# Altium PCB Safety.PcbDoc
Units mm, origin at the board's own origin, x right, y up, seen from the top; angles counter-clockwise.
Board outline 63.5 x 63.5 mm, 2 copper layers (Top Layer, Bottom Layer), stack 1.443 mm thick; 54 components, 58 nets, 210 pads, 36 vias.
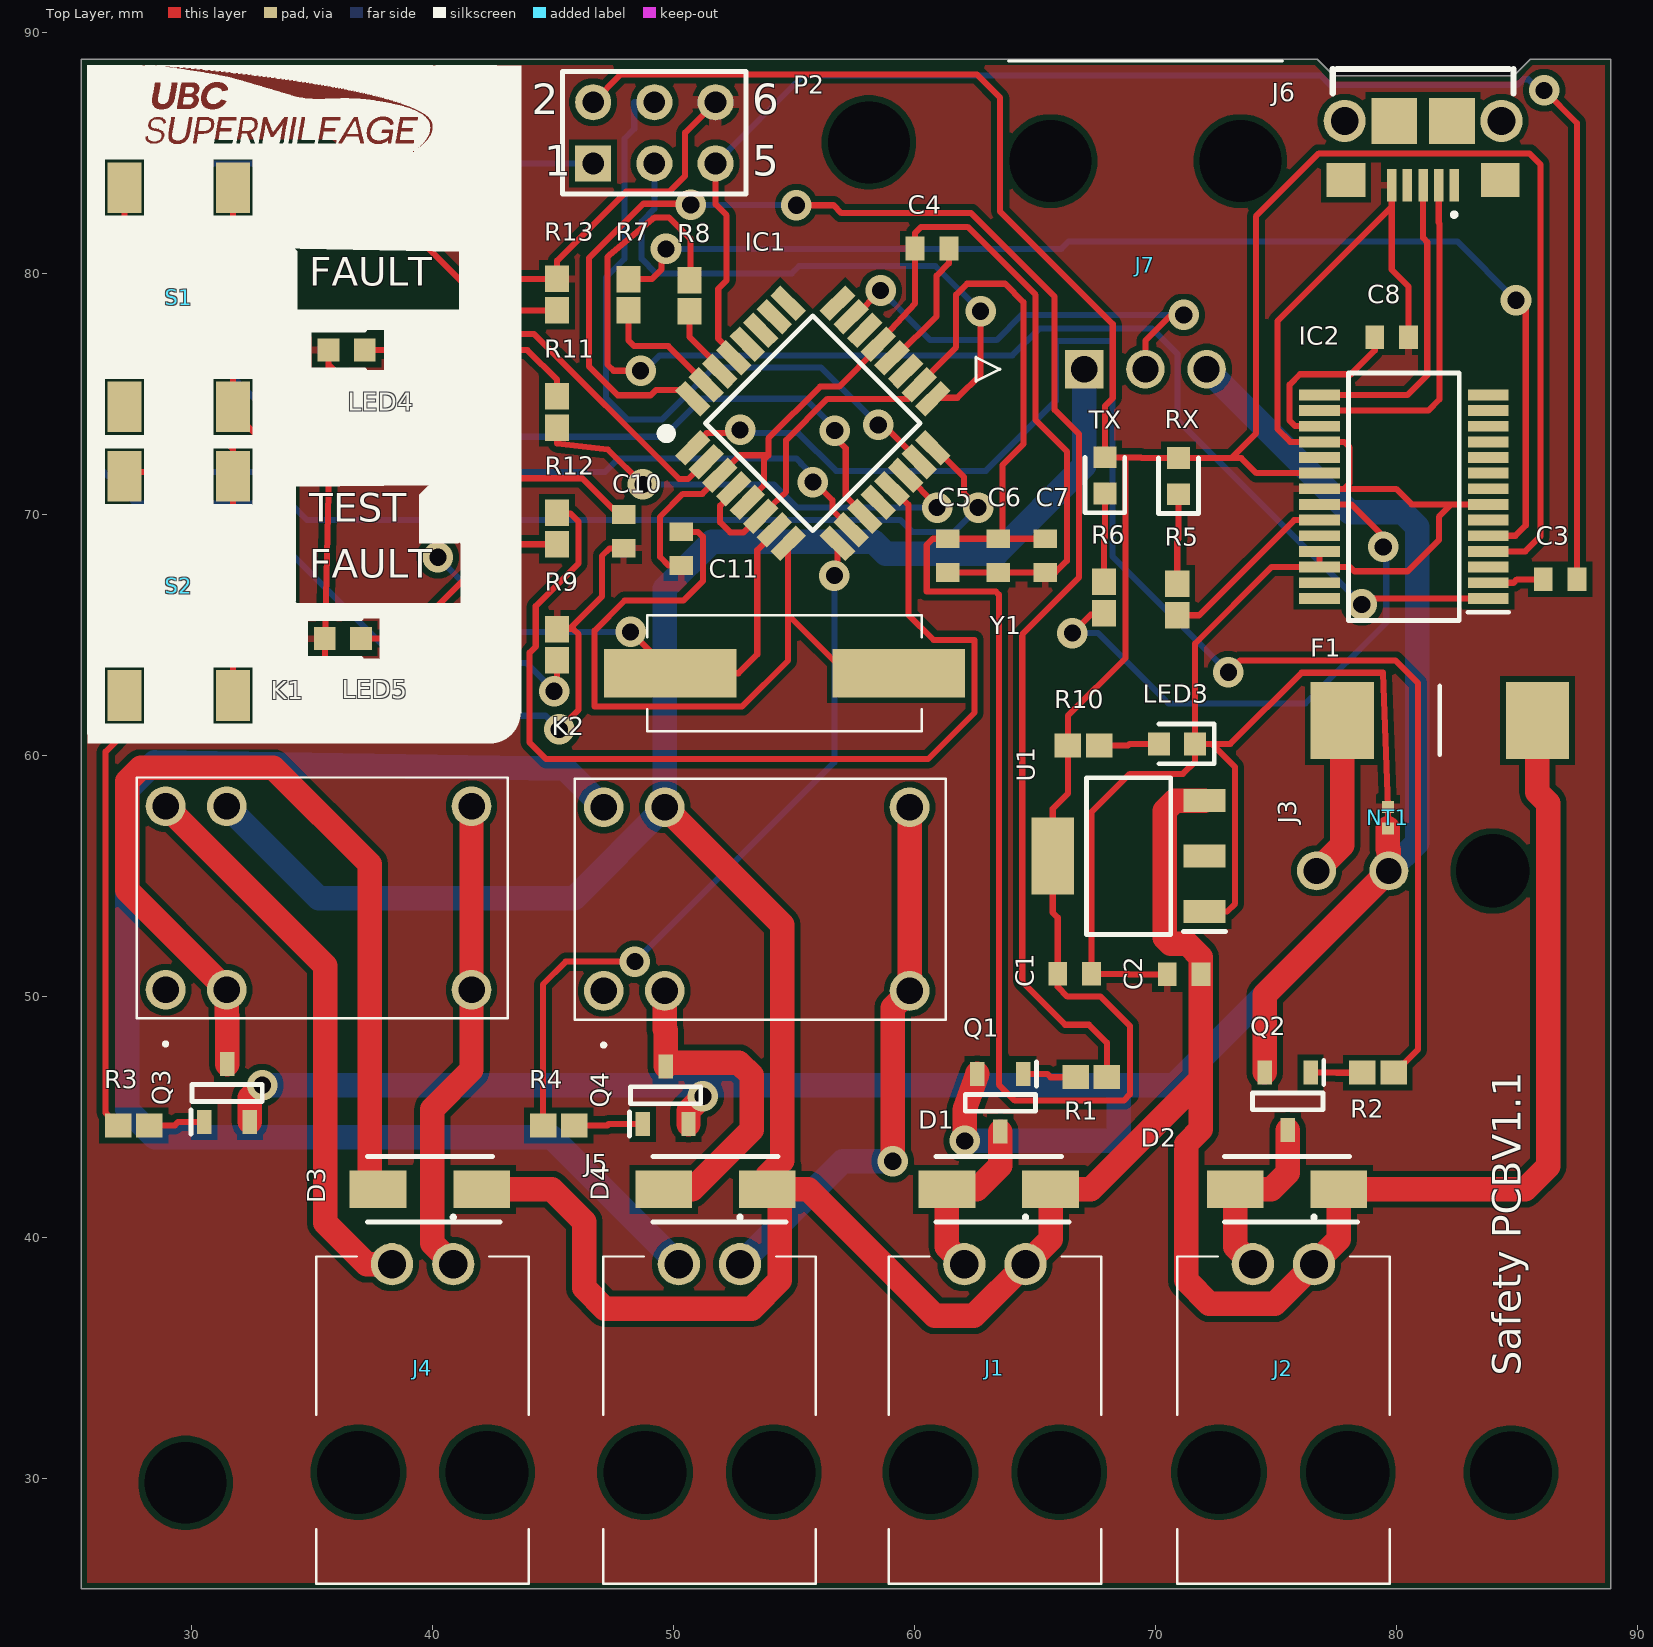
[diagram p0: Top Layer view]
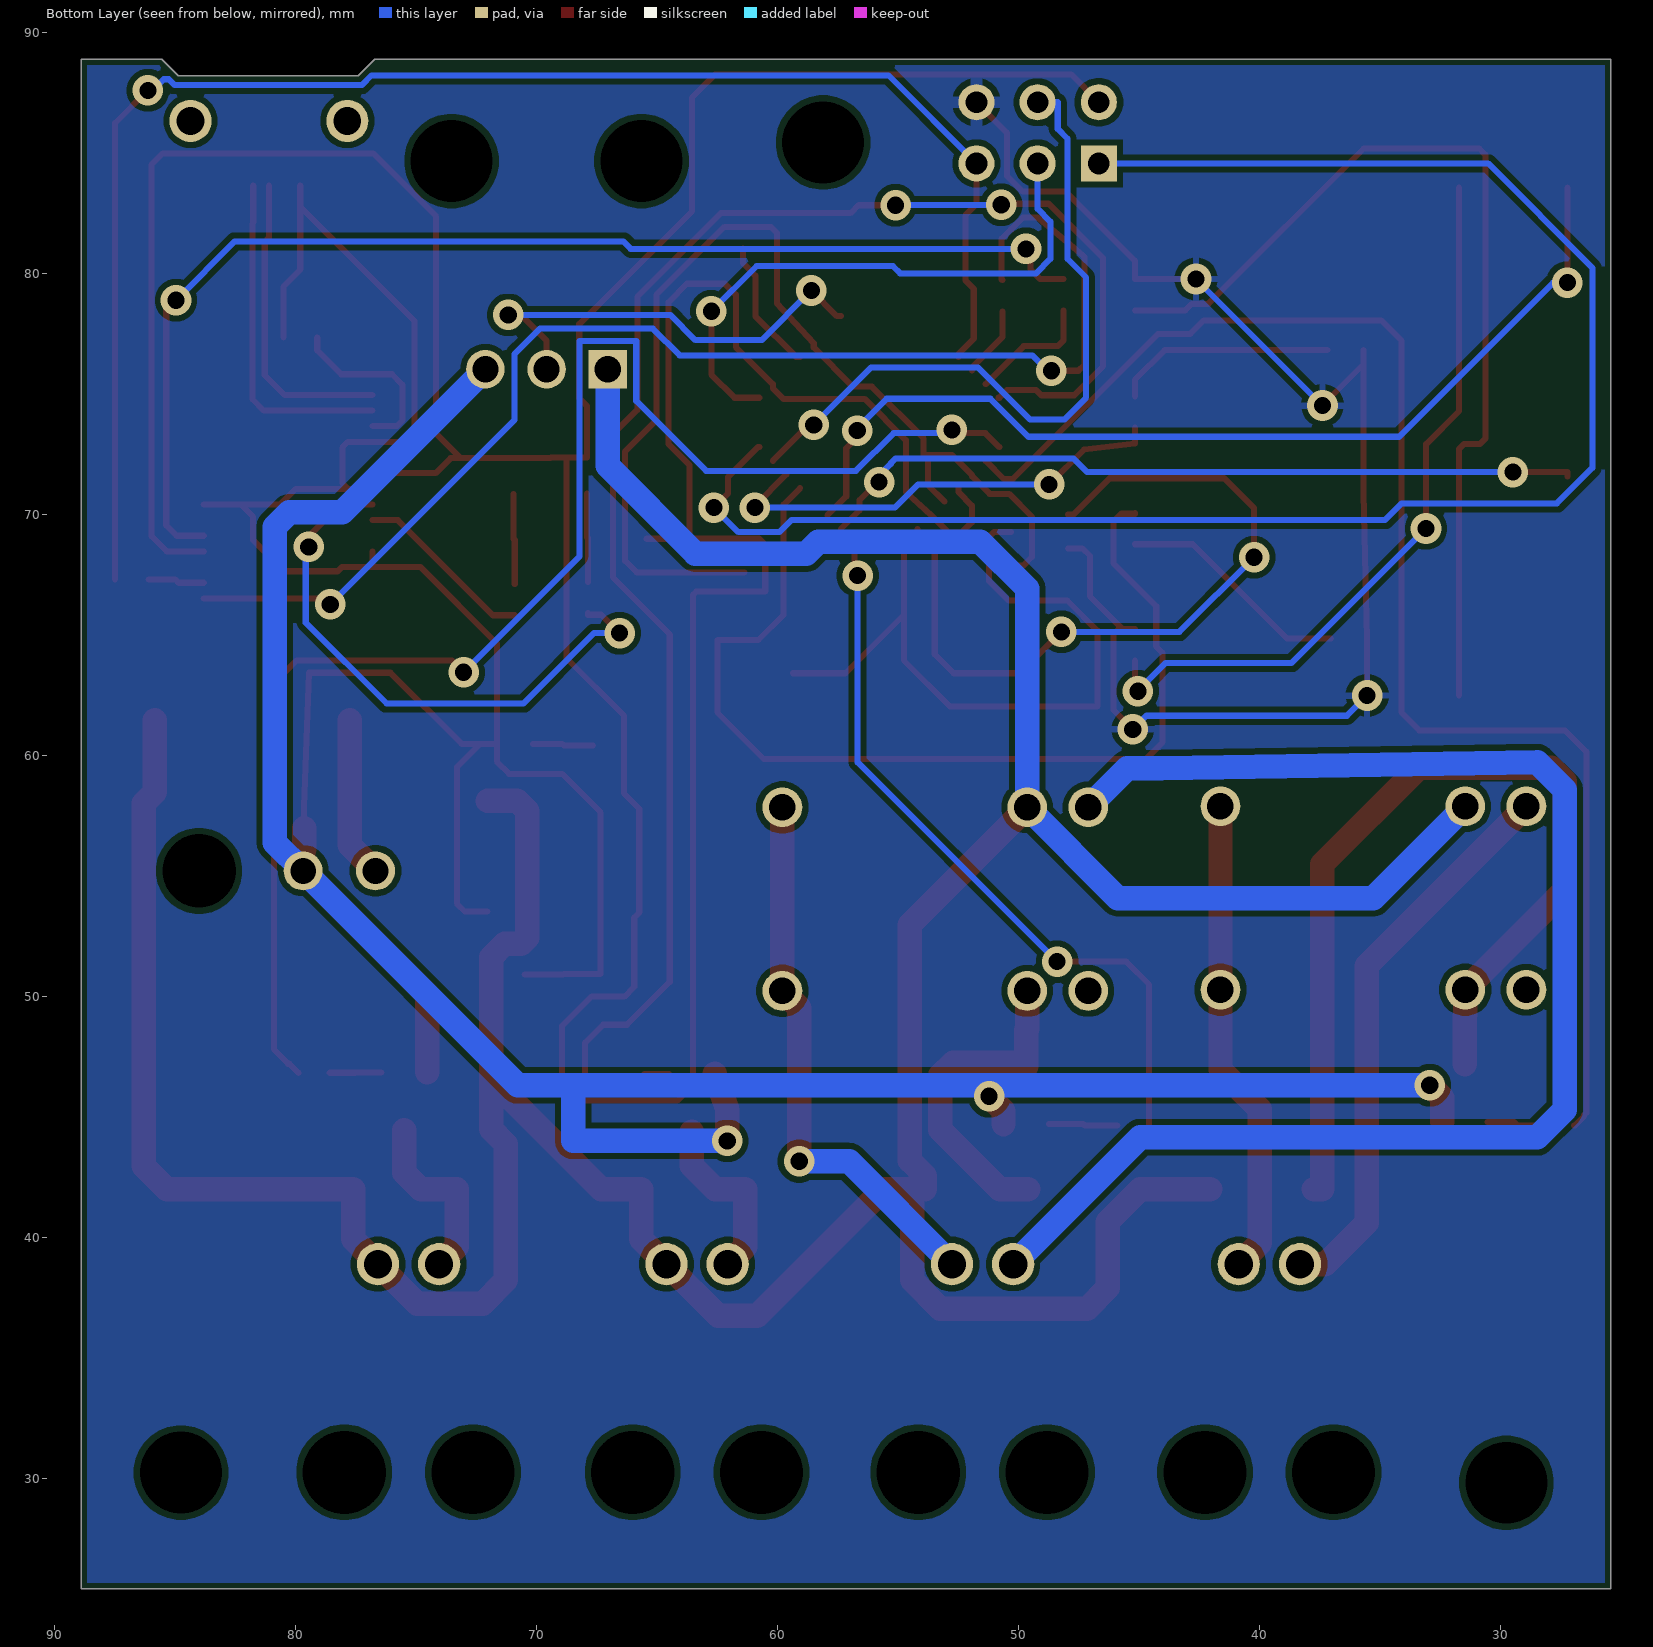
[diagram p1: Bottom Layer view, seen from below]
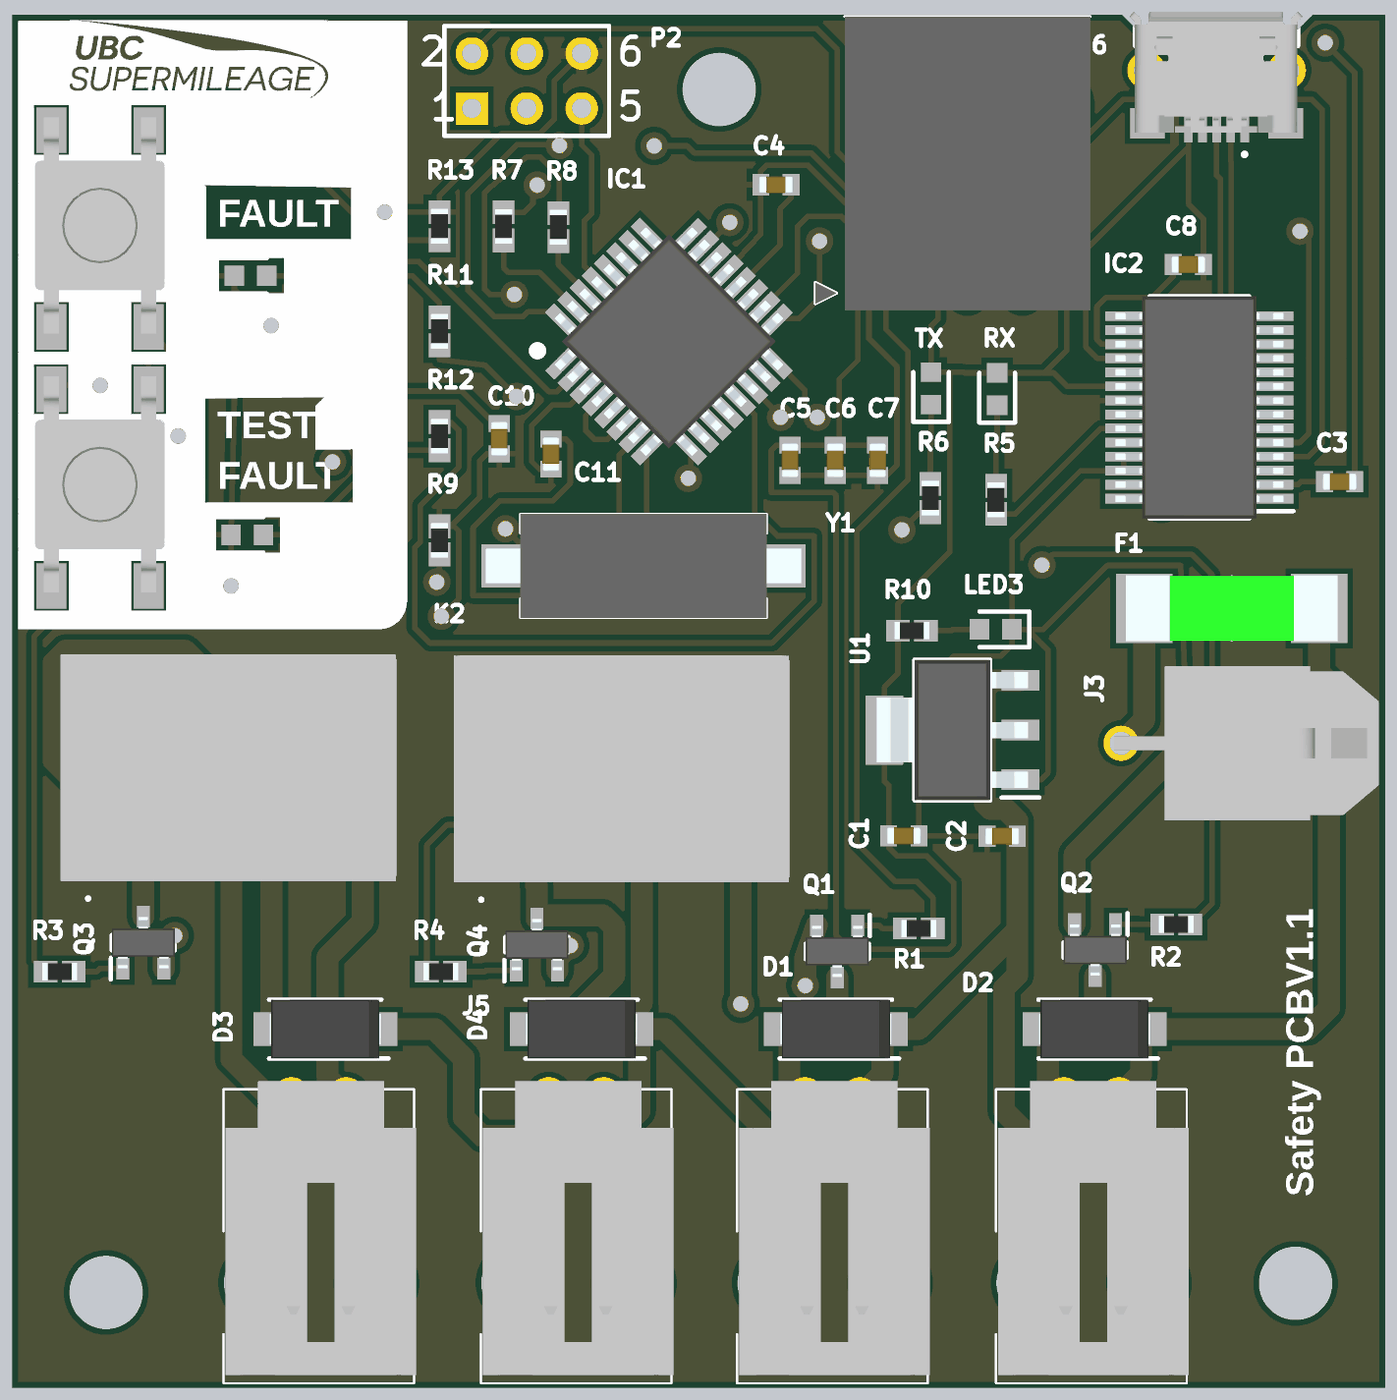
[diagram p2: 3D render of the assembled board from above, using the file's embedded part models]

## Layer stack, top to bottom
Top Solder: solder mask 0.0102, Solder Resist, Dk 3.5
Top Layer: signal copper 0.0356
Dielectric 1: dielectric 1.3716, FR-4, Dk 4.8
Bottom Layer: signal copper 0.0356
Bottom Solder: solder mask 0.0102, Solder Resist, Dk 3.5

## Board outline
25.4,25.4 25.4,88.9 76.71,88.9 77.396,88.214 84.872,88.214 85.558,88.9 88.9,88.9 88.9,25.4

## Design rules (kind name [scope] priority, off if disabled: settings)
BoardOutlineClearance [All] p1: gap=0.254 ignorepadtopadclearanceinfootprint=FALSE except(0: Arc-SplitContinuation Track-SplitContinuation SMDPad-SplitContinuation THPad-SplitContinuation Via-SplitContinuation Fill-SplitContinuation Poly-SplitContinuation Region-SplitContinuation Text-SplitContinuation)
Clearance [All] p1: gap=0.254 ignorepadtopadclearanceinfootprint=TRUE
PolygonConnect [All] p1: thpad.connectstyle=Relief thpad.reliefconductorwidth=0.508 thpad.reliefentries=4 thpad.polygonreliefangle="90 Angle" thpad.airgapwidth=0.254 smdpad.connectstyle=Relief smdpad.reliefconductorwidth=0.254 smdpad.reliefentries=4 smdpad.polygonreliefangle="90 Angle" smdpad.airgapwidth=0.254 via.connectstyle=Relief via.reliefconductorwidth=0.254 via.reliefentries=4 via.polygonreliefangle="90 Angle" via.airgapwidth=0.254
RoutingVias [All] p1: holewidth=0.711 width=1.27 viastyle="Through Hole" minholewidth=0.711 minwidth=1.27 maxholewidth=0.711 maxwidth=1.27
SolderMaskExpansion [IsVia] p1: expansion=0.102 istentingtop=TRUE
Width "Width_HIGH CURRENT" [InNetClass('PWR')] p1: maxlimit=2.54 minlimit=0.762 preferedwidth=1.016 minimp=50.000000 maximp=50.000000 favimp=50.000000
Width Width_1 [All] p2: maxlimit=0.254 minlimit=0.152 preferedwidth=0.254 bottomlayer_minwidth=0.254 minimp=50.000000 maximp=50.000000 favimp=50.000000
30 further rules are at their usual default settings.

## Classes and differential pairs
net class PWR: +12 NetD1_2 NetD2_2 NetD3_2 NetD4_2 NetF1_2 NetJ4_1 NetJ4_2 NetJ5_1 NetJ5_2 PWR_GND
component class Sheet2: C3 C4 C5 C6 C7 C8 C10 C11 IC1 IC2 J6 J7 LED3 LED4 LED5 P2 R5 R6 R7 R8 R9 R10 R11 R12 R13 RX S1 S2 TX Y1
component class Sheet1: C1 C2 D1 D2 D3 D4 F1 J1 J2 J3 J4 J5 K1 K2 NT1 Q1 Q2 Q3 Q4 R1 R2 R3 R4 U1

## Components (designator, comment, footprint, x,y, rotation, side; value= is the part's Value field where it differs from the comment)
C1 "C0603C104K3RACTU" CAPC1608X95N 66.638,50.926 r180 top
C2 "C0603C104K3RACTU" CAPC1608X95N 71.185,50.907 r0 top
C3 "C0603C104K3RACTU" CAPC1608X95N 86.796,67.304 r0 top
C4 "C0603C104K3RACTU" CAPC1608X95N 60.72,81.043 r0 top
C5 "C0603C104K3RACTU" CAPC1608X95N 61.376,68.294 r90 top
C6 "C0603C104K3RACTU" CAPC1608X95N 63.463,68.294 r90 top
C7 "C0603C104K3RACTU" CAPC1608X95N 65.427,68.294 r90 top
C8 "C0603C104K3RACTU" CAPC1608X95N 79.799,77.349 r180 top
C10 "C0603C104K3RACTU" CAPC1608X95N 47.925,69.294 r90 top
C11 "C0603C104K3RACTU" CAPC1608X95N 50.313,68.58 r270 top
D1 "S1A" DIOM5227X270N 63.492,41.985 r180 top
D2 "S1A" DIOM5227X270N 75.462,41.985 r180 top
D3 "S1A" DIOM5227X270N 39.874,41.985 r180 top
D4 "S1A" DIOM5227X270N 51.73,41.985 r180 top
F1 "0678H9100-02" FUSC9830X318N 81.802,61.45 r180 top
IC1 "ATMEGA328P-AU" QFP80P900X900X120-32N 55.771,73.786 r45 top
IC2 "FT232RL" SOP65P778X200-28N 80.311,70.739 r180 top
J1 "171975-0002" 1719750002 63.333,38.877 r0 top
J2 "171975-0002" 1719750002 75.31,38.877 r0 top
J3 "0430450200" 43045-0200 84.006,55.204 r90 top
J4 "171975-0002" 1719750002 39.576,38.877 r0 top
J5 "171975-0002" 1719750002 51.48,38.877 r0 top
J6 "2013499-1" 2013499-1 81.106,88.486 r180 top
J7 "1719750003" 171975YY03 67.04,76.028 r180 top
K1 "1422037-2" 14220372 28.904,50.27 r0 top
K2 "1422037-2" 14220372 47.089,50.22 r0 top
LED3 "LTST-C191TBKT-5A" LEDC1608X65N 70.891,60.474 r180 top
LED4 "LTST-C191TBKT-5A" LEDC1608X65N 36.417,76.826 r0 top
LED5 "LTST-C191TBKT-5A" LEDC1608X65N 36.265,64.847 r0 top
NT1 "NetTie10" NetTie 79.649,56.966 r90 top net-tie
P2 "Header 3X2" HDR2X3 46.654,84.572 r0 top
Q1 "BCW66GLT1G" SOT95P237X111-3N 63.557,45.577 r270 top
Q2 "BCW66GLT1G" SOT95P237X111-3N 75.485,45.639 r270 top
Q3 "BCW66GLT1G" SOT95P237X111-3N 31.457,45.983 r90 top
Q4 "BCW66GLT1G" SOT95P237X111-3N 49.662,45.889 r90 top
R1 "RC0603DR-07270KL" RESC1608X55N 67.33,46.639 r180 top
R2 "RC0603DR-07270KL" RESC1608X55N 79.232,46.826 r180 top
R3 "RC0603DR-07270KL" RESC1608X55N 27.585,44.64 r0 top
R4 "RC0603DR-07270KL" RESC1608X55N 45.222,44.64 r0 top
R5 "RC0603DR-07270KL" RESC1608X55N 70.9,66.466 r90 top
R6 "RC0603DR-07270KL" RESC1608X55N 67.862,66.55 r90 top
R7 "RC0603DR-07270KL" RESC1608X55N 48.123,79.117 r90 top
R8 "RC0603DR-07270KL" RESC1608X55N 50.656,79.077 r90 top
R9 "RC0603DR-07270KL" RESC1608X55N 45.158,64.591 r90 top
R10 "RC0603DR-07270KL" RESC1608X55N 67.012,60.414 r180 top
R11 "RC0603DR-07270KL" RESC1608X55N 45.158,74.26 r270 top
R12 "RC0603DR-07270KL" RESC1608X55N 45.158,69.415 r90 top
R13 "RC0603DR-07270KL" RESC1608X55N 45.158,79.125 r90 top
RX "LTST-C191TBKT-5A" LEDC1608X65N 70.954,71.591 r90 top (schematic designator LED1)
S1 "5-1437565-0" FSM6JSMATR 29.45,79.792 r0 top
S2 "5-1437565-0" FSM6JSMATR 29.45,67.808 r0 top
TX "LTST-C191TBKT-5A" LEDC1608X65N 67.897,71.622 r90 top (schematic designator LED2)
U1 "LM1117IMPX-5.0_NOPB" SOT230P700X180-4N 68.882,55.818 r180 top
Y1 "ECS-160-18-5PX-CKM-TR" ECS49205PXTR 54.595,63.408 r0 top

## Footprints (in the part's own frame and the unit in brackets; to place one, negate y for a bottom-side part, rotate by r counter-clockwise, add the part's x,y. Pads: shape width x height; smd on the part's side, far side on the other; paste and mask are expansions set on the pad)
43045-0200 [mm]
  round 1.62 hole 1.07: 1(0,4.32) 2(0,7.32)
  round 1.524 hole 3.05 unplated mask+0.102: 3(0,0)
  body extent -3.57,-4.6 3.58,7.64, height 8.25
171975YY03 [mm]
  rect 1.6x1.6 hole 1.09: 1(0,0)
  round 1.6 hole 1.09: 2(-2.54,0) 3(-5.08,0)
  round 1.524 hole 3.4 unplated mask+0.102: 4(1.4,-8.64) 5(-6.48,-8.64)
  silkscreen extent -8.22,-12.8 4.5,0.5, body extent -8.22,-12.8 4.5,0.79, height 7.1
2013499-1 [mm]
  rect 0.4x1.35 smd: 1(-1.3,4.825) 2(-0.65,4.825) 3(0,4.825) 4(0.65,4.825) 5(1.3,4.825)
  rect 1.6x1.4 smd: 6(-3.2,4.6) 7(3.2,4.6)
  rect 1.9x1.9 smd: 8(-1.2,2.15) 9(1.2,2.15)
  round 1.75 hole 1.15: 10(-3.255,2.15) 11(3.255,2.15)
  silkscreen extent -3.75,0 3.75,6.09, body extent -3.97,-0.56 4.03,5.04, height 2.68
14220372 [mm]
  round 1.65 hole 1.1: 1(0,0) 2(2.54,0) 6(12.7,0) 7(12.7,7.62) 11(2.54,7.62) 12(0,7.62)
  silkscreen extent -1.2,-2.3 14.2,8.81, body extent -1.27,-1.44 14.23,9.06, height 12.06
1719750002 [mm]
  round 1.755 hole 1.17: 1(1.27,0) 2(-1.27,0)
  round 1.725 hole 3.45 unplated mask+0.102: MH1(2.67,-8.64) MH2(-2.67,-8.64)
  silkscreen extent -4.41,-13.27 4.41,2, body extent -4.32,-12.89 4.5,0.7, height 7.63
CAPC1608X95N [mm]
  rect 0.78x0.98 smd: 1(-0.7,0) 2(0.7,0)
  body extent -0.8,-0.4 0.8,0.4, height 0.95
DIOM5227X270N [mm]
  rect 2.35x1.55 smd: 1(-2.15,0) 2(2.15,0)
  silkscreen extent -2.93,-1.36 2.6,1.36, body extent -2.6,-1.36 2.6,1.36, height 2.7
ECS49205PXTR [mm]
  rect 5.5x2 smd: 1(-4.75,0) 2(4.75,0)
  silkscreen extent -5.7,-2.4 5.7,2.4, body extent -7.3,-2.4 7.3,2.4, height 4.4
FSM6JSMATR [mm]
  rect 1.4x2.1 smd: 1(2.25,3.775) 2(2.25,-5.325) 3(-2.25,3.775) 4(-2.25,-5.325)
  silkscreen extent -3,-3.77 3,5.32, body extent -3,-5.63 3,4.37, height 7.21
FUSC9830X318N [mm]
  rect 2.62x3.2 smd: 1(-4.05,0) 2(4.05,0)
  silkscreen extent 0,-1.43 0,1.43, body extent -4.9,-1.53 4.9,1.53, height 3.18
HDR2X3 [mm] "Connector; Header; 3x2 Position"
  rect 1.5x1.5 hole 0.9: 1(0,0)
  round 1.5 hole 0.9: 2(0,2.54) 3(2.54,0) 4(2.54,2.54) 5(5.08,0) 6(5.08,2.54)
  silkscreen extent -1.27,-1.27 6.35,3.81
LEDC1608X65N [mm]
  rect 0.9x0.95 smd: 1(-0.75,0) 2(0.75,0)
  silkscreen extent -1.55,-0.82 0.75,0.82
NetTie [mil]
  rect 20x20 smd paste+0 mask+4: 1(35,0) 2(0,0)
  Top Layer lines w10: 0,0 35,0
QFP80P900X900X120-32N [mm]
  rect 1.5x0.6 smd: 1(-4.25,2.8) 2(-4.25,2) 3(-4.25,1.2) 4(-4.25,0.4) 5(-4.25,-0.4) 6(-4.25,-1.2) 7(-4.25,-2) 8(-4.25,-2.8) 17(4.25,-2.8) 18(4.25,-2) 19(4.25,-1.2) 20(4.25,-0.4) 21(4.25,0.4) 22(4.25,1.2) 23(4.25,2) 24(4.25,2.8)
  rect 0.6x1.5 smd: 9(-2.8,-4.25) 10(-2,-4.25) 11(-1.2,-4.25) 12(-0.4,-4.25) 13(0.4,-4.25) 14(1.2,-4.25) 15(2,-4.25) 16(2.8,-4.25) 25(2.8,4.25) 26(2,4.25) 27(1.2,4.25) 28(0.4,4.25) 29(-0.4,4.25) 30(-1.2,4.25) 31(-2,4.25) 32(-2.8,4.25)
  silkscreen extent -4.8,-3.15 3.15,4.2, body extent -4.5,-4.5 4.5,4.5, height 1.2
RESC1608X55N [mm]
  rect 1.1x1 smd: 1(-0.65,0) 2(0.65,0)
  body extent -0.8,-0.4 0.8,0.4, height 0.55
SOP65P778X200-28N [mm]
  rect 1.7x0.45 smd: 1(-3.5,4.225) 2(-3.5,3.575) 3(-3.5,2.925) 4(-3.5,2.275) 5(-3.5,1.625) 6(-3.5,0.975) 7(-3.5,0.325) 8(-3.5,-0.325) 9(-3.5,-0.975) 10(-3.5,-1.625) 11(-3.5,-2.275) 12(-3.5,-2.925) 13(-3.5,-3.575) 14(-3.5,-4.225) 15(3.5,-4.225) 16(3.5,-3.575) 17(3.5,-2.925) 18(3.5,-2.275) 19(3.5,-1.625) 20(3.5,-0.975) 21(3.5,-0.325) 22(3.5,0.325) 23(3.5,0.975) 24(3.5,1.625) 25(3.5,2.275) 26(3.5,2.925) 27(3.5,3.575) 28(3.5,4.225)
  silkscreen extent -4.35,-5.14 2.3,5.14, body extent -3.89,-5.14 3.89,5.14, height 2
SOT95P237X111-3N [mm]
  rect 1x0.6 smd: 1(-1.2,0.95) 2(-1.2,-0.95) 3(1.2,0)
  silkscreen extent -1.7,-1.46 0.35,1.5, body extent -1.18,-1.46 1.18,1.46, height 1.11
SOT230P700X180-4N [mm]
  rect 1.75x0.95 smd: 1(-3.15,2.3) 2(-3.15,0) 3(-3.15,-2.3)
  rect 1.75x3.2 smd: 4(3.15,0)
  silkscreen extent -4.02,-3.25 1.75,3.25, body extent -3.5,-3.25 3.5,3.25, height 1.8

## Part data
C1 C2 C3 C4 C5 C6 C7 C8: "Capacitor", Manufacturer_Name=Kemet, Mouser Part Number=80-C0603C104K3R, Arrow Part Number=C0603C104K3RACTU, Arrow Price/Stock=https://www.arrow.com/en/products/c0603c104k3ractu/kemet-corporation, Datasheet Link=https://content.kemet.com/datasheets/KEM_C1002_X7R_SMD.pdf, Height=0.95mm, Manufacturer_Part_Number=C0603C104K3RACTU, Mouser Price/Stock=https://www.mouser.co.uk/ProductDetail/KEMET/C0603C104K3RACTU/?qs=l5k%252BbMnNDklvfdneglCDAg%3D%3D
C10 C11: library part 06035A200KAT2A, "Capacitor 20pf", Manufacturer_Name=Kemet, Mouser Part Number=80-C0603C104K3R, Arrow Part Number=C0603C104K3RACTU, Arrow Price/Stock=https://www.arrow.com/en/products/c0603c104k3ractu/kemet-corporation, Datasheet Link=https://content.kemet.com/datasheets/KEM_C1002_X7R_SMD.pdf, Height=0.95mm, Manufacturer_Part_Number=C0603C104K3RACTU, Mouser Price/Stock=https://www.mouser.co.uk/ProductDetail/KEMET/C0603C104K3RACTU/?qs=l5k%252BbMnNDklvfdneglCDAg%3D%3D
D1 D2 D3 D4: "Diode", Manufacturer_Name="ON Semiconductor", Mouser Part Number=512-S1A, Arrow Part Number=S1A, Arrow Price/Stock=https://www.arrow.com/en/products/s1a/on-semiconductor, Datasheet Link=http://www.onsemi.com/pub/Collateral/S1M-D.pdf, Height=2.7mm, Manufacturer_Part_Number=S1A, Mouser Price/Stock=https://www.mouser.co.uk/ProductDetail/ON-Semiconductor-Fairchild/S1A/?qs=RJwZ8kJo1mjAagviH5vK9g%3D%3D
F1: "Fuse", Manufacturer_Name=Bel, Mouser Part Number=530-0678H9100-02, Datasheet Link="https://www.mouser.com/datasheet/2/643/Bel Fuse_02202018_0678H-1288534.pdf", Height=3.18mm, Manufacturer_Part_Number=0678H9100-02
IC1: "Integrated Circuit", Manufacturer_Name=Microchip, Mouser Part Number=556-ATMEGA328P-AU, Arrow Part Number=ATMEGA328P-AU, Arrow Price/Stock=https://www.arrow.com/en/products/atmega328p-au/microchip-technology, Datasheet Link=https://componentsearchengine.com/Datasheets/2/ATMEGA328P-AU.pdf, Height=1.2mm, Manufacturer_Part_Number=ATMEGA328P-AU, Mouser Price/Stock=https://www.mouser.co.uk/ProductDetail/Microchip-Technology-Atmel/ATMEGA328P-AU?qs=K8BHR703ZXiCmmgp6%2FGNmQ%3D%3D
IC2: "Integrated Circuit", Manufacturer_Name="FTDI Chip", Arrow Part Number=FT232RL, Arrow Price/Stock=https://www.arrow.com/en/products/ft232rl/ftdi-chip, Datasheet Link=http://www.ftdichip.com/Support/Documents/DataSheets/ICs/DS_FT232R.pdf, Height=2mm, Manufacturer_Part_Number=FT232RL
J1 J2 J4 J5: "Connector", Manufacturer_Name=Molex, Mouser Part Number=538-171975-0002, Datasheet Link=https://www.molex.com/pdm_docs/sd/1719750002_sd.pdf, Height=7.38mm, Manufacturer_Part_Number=171975-0002, Mouser Price/Stock=https://www.mouser.co.uk/ProductDetail/Molex/171975-0002?qs=lc2O%252BfHJPVZp75AIAAjPAw%3D%3D
J3: "Connector", Manufacturer_Name=Molex, Mouser Part Number=N/A, Arrow Part Number=0430450200, Arrow Price/Stock=https://www.arrow.com/en/products/0430450200/molex, Datasheet Link=http://www.molex.com/webdocs/datasheets/pdf/en-us//0430450200_PCB_HEADERS.pdf, Manufacturer_Part_Number=0430450200, Mouser Price/Stock=https://www.mouser.com/Search/Refine.aspx?Keyword=N%2FA
J6: "Connector", Manufacturer_Name="TE Connectivity", Mouser Part Number=571-2013499-1, Arrow Part Number=2013499-1, Arrow Price/Stock=https://www.arrow.com/en/products/2013499-1/te-connectivity, Datasheet Link=http://www.te.com/commerce/DocumentDelivery/DDEController?Action=showdoc&DocId=Customer+Drawing%7F2013499%7FB2%7Fpdf%7FEnglish%7FENG_CD_2013499_B2.pdf%7F2013499-1, Manufacturer_Part_Number=2013499-1, Mouser Price/Stock=https://www.mouser.co.uk/ProductDetail/TE-Connectivity/2013499-1/?qs=TL6PIybY3BOLK37GbUYdng%3D%3D
J7: "Connector", Manufacturer_Name=Molex, Datasheet Link=https://www.molex.com/pdm_docs/sd/1719750002_sd.pdf, Height=7mm, Manufacturer_Part_Number=1719750003
K1 K2: "Relay or Contactor", Manufacturer_Name="TE Connectivity", Mouser Part Number=655-1422037-2, Datasheet Link=https://www.te.com/commerce/DocumentDelivery/DDEController?Action=srchrtrv&DocNm=108-98010&DocType=SS&DocLang=EN, Height=11.7mm, Manufacturer_Part_Number=1422037-2, Mouser Price/Stock=https://www.mouser.com/Search/Refine.aspx?Keyword=655-1422037-2
LED3 LED4 LED5 RX TX: "LED", Manufacturer_Name=Lite-On, Mouser Part Number=859-LTST-C191TBKT-5A, Arrow Part Number=LTST-C191TBKT-5A, Arrow Price/Stock=https://www.arrow.com/en/products/ltst-c191tbkt-5a/lite-on-technology, Datasheet Link=http://www.mouser.com/ds/2/239/S_110_LTST-C191TBKT-5A-336399.pdf, Height=0.65mm, Manufacturer_Part_Number=LTST-C191TBKT-5A, Mouser Price/Stock=https://www.mouser.co.uk/ProductDetail/Lite-On/LTST-C191TBKT-5A/?qs=xb8aMrBSZRLgwF8AXHEbeQ%3D%3D
P2: "Header, 3-Pin, Dual row", LatestRevisionDate=17-Jul-2002, LatestRevisionNote="Re-released for DXP Platform.", Publisher="Altium Limited"
Q1 Q2 Q3 Q4: "Transistor BJT NPN", Manufacturer_Name="ON Semiconductor", Mouser Part Number=863-BCW66GLT1G, Arrow Part Number=BCW66GLT1G, Arrow Price/Stock=https://www.arrow.com/en/products/bcw66glt1g/on-semiconductor, Datasheet Link=http://www.onsemi.com/pub/Collateral/BCW66GLT1-D.PDF, Height=1.11mm, Manufacturer_Part_Number=BCW66GLT1G, Mouser Price/Stock=https://www.mouser.co.uk/ProductDetail/ON-Semiconductor/BCW66GLT1G?qs=R2UZ7gjkEjKs0bN2RlXbWw%3D%3D
R1 R2 R3 R4 R5 R6 R7 R8 R9 R10 R11 R12 R13: "Resistor", Manufacturer_Name="YAGEO (PHYCOMP)", Arrow Part Number=RC0603DR-07270KL, Arrow Price/Stock=https://www.arrow.com/en/products/rc0603dr-07270kl/yageo, Datasheet Link=http://www.yageo.com/documents/recent/PYu-RC0603_51_RoHS_L_v5.pdf, Height=0.55mm, Manufacturer_Part_Number=RC0603DR-07270KL
S1 S2: "Switch", Manufacturer_Name="TE Connectivity", Mouser Part Number=506-5-1437565-0, Datasheet Link=https://www.te.com/commerce/DocumentDelivery/DDEController?Action=showdoc&DocId=Customer+Drawing%7F2-1437565-7%7FV%7Fpdf%7FEnglish%7FENG_CD_2-1437565-7_V.pdf%7F5-1437565-0, Height=7.26mm, Manufacturer_Part_Number=5-1437565-0, Mouser Price/Stock=https://www.mouser.co.uk/ProductDetail/TE-Connectivity-PB/5-1437565-0?qs=%2FwXgF%2FfIho9mO1nArmyR6A%3D%3D
U1: "Undefined or Miscellaneous", Arrow Part Number=LM1117IMPX-5.0/NOPB, Manufacturer_Name="Texas Instruments", Mouser Part Number=926-LM1117IMPX50NOPB, Arrow Price/Stock=https://www.arrow.com/en/products/lm1117impx-5.0nopb/texas-instruments, Datasheet Link=http://www.ti.com/lit/gpn/lm1117, Height=1.8mm, Manufacturer_Part_Number=LM1117IMPX-5.0/NOPB, Mouser Price/Stock=https://www.mouser.co.uk/ProductDetail/Texas-Instruments/LM1117IMPX-50-NOPB?qs=X1J7HmVL2ZGGwLlD0uGqKQ%3D%3D
Y1: "Crystal or Oscillator", Manufacturer_Name=ECS, Datasheet Link=https://ecsxtal.com/store/pdf/csm-7x.pdf, Height=4.3mm, Manufacturer_Part_Number=ECS-160-18-5PX-CKM-TR

## Free pads (board coordinates)
  round 1.524 hole 3.4 unplated mask+0.102: 1(29.737,29.802) 2(58.097,85.445) 2(84.758,30.223)

## Via types
v1: diameter 1.27, hole 0.711, Top Layer to Bottom Layer, tented both sides, 36 vias

## Nets (pads, with @x,y where several pads share a name; then routed paths per layer and width w, separated by ;. In a path a pad name is that pad's centre, name@x,y a point inside that pad or via, vN(x,y) a via of type N, cw(c..) or ccw(c..) an arc to the next point about the centre after c; other vN are vias at no path point)
+3.3: C8.2 IC2.17 | length 7.5
  Top Layer w0.254: IC2.17 75.794,73.664 75.565,73.893 75.565,75.387 75.997,75.819 78.108,75.819 79.099,76.81 C8.2
+5: C1.2 C5.2 C6.2 C7.2 IC1.4 IC1.6 IC1.18 IC2.4 IC2.20 P2.2 R10.2 RX.2 TX.2 U1.4 | length 183.2
  Top Layer w0.254: P2.2 47.807,88.265 62.586,88.265 63.551,87.3 63.551,82.575 68.224,77.902 68.224,74.828 67.897,74.501 TX.2 68.656,72.372 ; IC1.4@52.479,71.096 52.479,70.928 51.921,70.37 51.921,69.669 52.337,69.253 52.898,69.253 53.61,69.965 54.661,70.926 54.661,73.084 56.377,74.801 59.746,74.801 60.186,75.241 60.186,75.409 61.722,76.945 61.722,79.121 62.179,79.578 63.754,79.578 64.516,78.816 64.516,72.923 63.652,72.06 C6.2@63.652,68.994 ; C7.2 C6.2@63.652,68.994 ; IC2.20 74.185,71.714 73.558,72.341 73.152,72.341 ; IC2.4 85.355,68.464 85.979,69.088 85.979,84.531 85.522,84.988 76.784,84.988 74.168,82.372 74.168,73.357 73.152,72.341 ; C6.2@63.652,68.994 C6.2 C5.2 60.757,68.994 60.503,68.74 60.503,66.802 63.373,66.802 63.5,66.675 63.5,46.33 64.16,45.669 68.682,45.669 68.936,45.923 68.936,48.768 67.716,49.987 66.344,49.987 65.938,50.394 C1.2 65.938,53.264 65.732,53.47 U1.4 65.732,57.785 66.362,58.415 R10.2 66.362,61.646 68.758,64.041 68.758,72.27 68.656,72.372 ; 68.656,72.372 69.393,72.372 69.424,72.341 RX.2 73.152,72.341
+12: C2.2 D1.1 D2.1 D3.1 D4.1 F1.1 J1.1 J2.1 J7.1 K1.11 K2.11 U1.3 | length 178.6
  Top Layer w1.016: D3.1 44.934,41.985 46.279,40.64 46.279,37.897 47.142,37.033 53.238,37.033 54.407,38.202 D4.1@54.407,41.985 ; K2.11 54.508,52.961 54.508,43.18 53.873,42.545 53.873,41.985 D4.1 D4.1@54.407,41.985 ; U1.3 70.792,58.118 70.383,57.709 70.383,52.426 70.637,52.172 71.326,52.172 71.885,51.613 C2.2 71.885,46.56 ; F1.1 85.852,58.471 86.309,58.014 86.309,42.95 85.344,41.985 D2.1 77.612,39.909 J2.1 74.94,37.236 72.238,37.236 71.272,38.202 71.272,43.866 71.885,44.479 71.885,46.56 ; D4.1@54.407,41.985 55.575,41.985 60.832,36.728 62.454,36.728 J1.1 65.642,39.916 D1.1 67.31,41.985 71.885,46.56
  Bottom Layer w1.016: K1.11 35.257,54.077 45.865,54.077 K2.11 49.629,66.926 51.576,68.873 58.3,68.873 58.796,68.377 63.398,68.377 67.04,72.018 J7.1
A0: IC1.23 J7.2 | length 18.8
  Top Layer w0.254: IC1.23@57.358,78.238 57.526,78.238 v1(58.587,79.299) ; J7.2 69.58,77.216 70.647,78.283 v1(71.171,78.283)
  Bottom Layer w0.254: v1(58.587,79.299) 60.645,77.241 63.398,77.241 64.44,78.283 v1(71.171,78.283)
A1: IC1.24
A2: IC1.25
A3: IC1.26
A4: IC1.27
A5: IC1.28
A6: IC1.22
A7: IC1.19
D0/RX: IC1.30 R8.1 | length 3
  Top Layer w0.254: R8.1 50.656,77.36 51.913,76.103 IC1.30@51.913,75.975
D1/TX: IC1.31 R7.1 | length 5.2
  Top Layer w0.254: R7.1 48.123,77.216 48.352,76.987 49.769,76.987 IC1.31@51.348,75.409
D2: IC1.32 R1.1 | length 67.3
  Top Layer w0.254: v1(50.707,82.856) 50.666,82.897 48.737,82.897 46.475,80.635 46.475,76.146 47.672,74.949 49.042,74.949 49.255,75.162 50.464,75.162 50.782,74.844 IC1.32@50.822,74.844 ; v1(55.089,82.836) 56.632,82.836 56.958,82.51 62.346,82.51 65.811,79.045 65.811,74.346 66.827,73.33 66.827,67.386 64.465,65.024 64.465,50.597 66.244,48.818 67.235,48.818 67.98,48.073 R1.1
  Bottom Layer w0.254: v1(50.707,82.856) 50.717,82.846 55.079,82.846 v1(55.089,82.836)
D3: IC1.1 R2.1 | length 63
  Top Layer w0.254: IC1.1@50.782,72.793 51.37,73.381 52.628,73.381 v1(52.756,73.508) ; v1(73.025,63.449) 73.515,63.939 79.951,63.939 80.899,62.991 80.899,47.791 80.307,47.199 80.255,47.199 R2.1
  Bottom Layer w0.254: v1(52.756,73.508) 52.883,73.381 55.17,73.381 56.745,71.806 62.95,71.806 65.859,74.715 65.859,77.209 68.221,77.209 68.221,68.253 v1(73.025,63.449)
D4: IC1.2 R3.1 | length 60.2
  Top Layer w0.254: R3.1 26.885,44.64 26.512,45.013 26.512,45.066 26.416,45.162 26.416,60.147 27.305,61.036 33.35,61.036 34.087,61.773 34.087,77.216 34.925,78.054 42.291,78.054 42.85,77.495 44.196,77.495 50.219,71.473 50.593,71.473 IC1.2@51.348,72.227
D5: IC1.9 R4.1 | length 30.9
  Top Layer w0.254: R4.1 44.572,50.49 45.517,51.435 v1(48.387,51.435) ; v1(56.667,67.462) 56.792,67.587 IC1.9@56.792,68.833
  Bottom Layer w0.254: v1(48.387,51.435) 56.667,59.715 v1(56.667,67.462)
D6: IC1.10 S2.3 | length 32.2
  Top Layer w0.254: S2.3 27.2,71.755 v1(29.464,71.755) ; v1(55.773,71.341) 55.844,71.341 56.59,70.596 56.59,70.167 IC1.10@57.358,69.399
  Bottom Layer w0.254: v1(29.464,71.755) 47.137,71.755 47.707,72.326 55.087,72.326 55.293,72.119 55.293,72.096 55.773,71.616 v1(55.773,71.341)
D7: IC1.11 S1.3 | length 41.4
  Top Layer w0.254: v1(27.2,79.625) S1.3 ; v1(56.685,73.481) 56.685,73.206 57.142,72.749 57.142,70.746 IC1.11@57.924,69.965
  Bottom Layer w0.254: v1(27.2,79.625) 27.791,79.625 34.188,73.228 49.581,73.228 51.156,74.803 55.464,74.803 56.685,73.582 v1(56.685,73.481)
D8: IC1.12
D9: IC1.13 R12.2 | length 42.4
  Top Layer w0.254: R12.2 45.158,70.028 45.72,70.028 46.05,69.698 46.05,67.97 44.272,66.192 44.272,64.517 44.018,64.263 44.018,60.528 44.704,59.842 60.554,59.842 62.484,61.773 62.484,64.795 60.782,64.795 59.741,65.837 59.741,70.41 IC1.13@59.055,71.096
D10: IC1.14 R11.2 | length 19.4
  Top Layer w0.254: R11.2 45.158,72.949 47.269,72.695 v1(48.717,71.247) ; IC1.14@59.621,71.662 60.935,70.348 v1(60.935,70.282)
  Bottom Layer w0.254: v1(48.717,71.247) 54.153,71.247 55.118,70.282 v1(60.935,70.282)
D11/MOSI: IC1.15 P2.4 | length 29.5
  Top Layer w0.254: v1(58.491,73.72) 58.694,73.72 IC1.15@60.186,72.227
  Bottom Layer w0.254: P2.4 48.362,87.113 48.362,86.004 47.955,85.598 47.955,80.61 47.182,79.837 47.182,74.849 48.091,73.939 49.505,73.939 51.664,76.098 56.113,76.098 v1(58.491,73.72)
D12/MISO: IC1.16 P2.1 | length 71.9
  Top Layer w0.254: IC1.16@60.752,72.793 60.81,72.793 62.052,71.551 62.052,70.866 v1(62.636,70.282)
  Bottom Layer w0.254: P2.1 30.496,84.573 26.162,80.239 26.162,71.93 27.635,70.457 34.087,70.457 34.77,69.774 59.411,69.774 59.919,69.266 61.62,69.266 v1(62.636,70.282)
D13/SCK: IC1.17 P2.3 | length 24.4
  Top Layer w0.254: IC1.17@60.752,74.844 61.773,74.844 62.738,75.809 v1(62.738,78.434)
  Bottom Layer w0.254: P2.3 49.194,82.687 48.662,82.154 48.662,80.606 49.257,80.01 54.905,80.01 55.209,80.315 60.857,80.315 v1(62.738,78.434)
GND: C1.1 C2.1 C4.1 C5.1 C6.1 C7.1 C8.1 C10.1 C11.2 IC1.3 IC1.5 IC1.21 IC2.7 IC2.18 IC2.21 IC2.25 IC2.26 J6.5 LED3.1 LED4.1 LED5.1 NT1.1 P2.6 R9.2 R13.2 U1.1 | length 191.3
  Top Layer w0.254: v1(35.515,62.484) LED5.1 35.667,70.891 35.667,76.227 ; LED4.1 35.667,76.227 ; v1(37.37,74.524) 35.667,76.227 ; v1(42.621,79.775) R13.2 45.158,80.536 48.027,83.405 49.818,83.405 50.474,84.06 50.474,85.852 P2.6 ; R9.2 45.669,65.241 ; v1(45.245,61.08) 46.05,61.885 46.05,65.024 45.833,65.241 45.669,65.241 ; C10.1 47.334,68.594 47.015,68.275 47.015,66.587 45.669,65.241 ; C11.2 49.784,67.88 49.428,68.235 49.428,69.901 50.381,70.854 51.19,70.854 IC1.3@51.913,71.577 ; IC1.3 52.748,72.46 53.927,72.46 ; IC1.5@53.059,70.53 53.746,71.218 53.746,72.28 53.927,72.46 ; C5.1 C6.1 C7.1 65.841,67.594 66.319,68.072 66.319,72.619 65.024,73.914 65.024,79.114 62.197,81.94 60.274,81.94 60.02,81.686 C4.1 60.02,78.765 58.489,77.106 58.489,76.938 56.86,75.309 56.082,75.309 53.927,73.154 53.927,72.46 ; C2.1 68.904,50.907 68.885,50.926 C1.1 67.338,57.635 68.936,59.233 71.133,59.233 71.641,59.741 LED3.1 ; U1.1 72.974,53.518 73.304,53.848 73.304,59.508 72.339,60.474 ; IC2.25 IC2.26 ; IC2.21 77.826,71.064 ; NT1.1 79.443,63.431 76.061,63.431 73.103,60.474 72.339,60.474 ; J6.5 79.806,82.778 ; C8.1 80.499,79.47 79.806,80.162 79.806,82.778 ; IC2.7 82.276,70.414 ; LED3.1 71.641,64.643 74.812,67.814 IC2.26 ; LED3.1 72.339,60.474 ; IC2.26 78.08,67.814 78.254,67.64 80.467,67.64 81.763,68.936 81.763,69.901 82.276,70.414 ; 77.826,71.064 79.985,71.064 80.635,70.414 82.276,70.414 ; 77.826,71.064 78.054,71.293 78.054,72.786 77.826,73.014 IC2.18 75.59,73.014 75.057,73.548 75.057,78.029 79.806,82.778
  Bottom Layer w0.254: v1(35.515,62.484) 36.353,61.646 44.679,61.646 v1(45.245,61.08) ; v1(37.37,74.524) v1(42.621,79.775)
NetC3_1: C3.1 IC2.2 | length 2.3
  Top Layer w0.254: IC2.2 84.861,67.164 85.001,67.304 C3.1
NetC4_2: C4.2 IC1.20 | length 5.6
  Top Layer w0.254: IC1.20@59.055,76.541 59.223,76.541 60.909,78.226 60.909,79.908 61.42,80.419 C4.2
NetC10_2: C10.2 IC1.7 Y1.1 | length 32
  Top Layer w0.254: v1(40.208,68.224) 40.208,70.256 41.453,71.501 46.2,71.501 47.707,69.994 C10.2 ; v1(48.209,65.126) 49.845,63.49 Y1.1 52.68,63.408 53.464,64.192 53.464,68.518 54.176,69.231 IC1.7@54.176,69.399
  Bottom Layer w0.254: v1(40.208,68.224) 43.307,65.126 v1(48.209,65.126)
NetC11_1: C11.1 IC1.8 Y1.2 | length 30.6
  Top Layer w0.254: C11.1 51.003,69.28 51.206,69.076 51.206,67.234 50.394,66.421 47.955,66.421 46.711,65.176 46.711,62.027 52.832,62.027 54.742,63.937 54.742,65.837 ; IC1.8@54.742,68.833 54.742,65.837 ; Y1.2 57.171,63.408 54.742,65.837
NetD1_2: D1.2 J1.2 Q1.3 | length 7.4
  Top Layer w1.016: J1.2 61.342,39.598 D1.2 62.586,41.985 63.557,42.956 Q1.3
NetD2_2: D2.2 J2.2 Q2.3 | length 7.6
  Top Layer w1.016: J2.2 73.312,39.605 D2.2 74.798,41.985 75.485,42.672 Q2.3
NetD3_2: D3.2 K1.2 Q3.3 | length 39.3
  Top Layer w1.016: Q3.3 31.457,49.191 31.444,49.205 K1.2 27.305,54.409 27.305,58.928 27.864,59.487 33.376,59.487 37.389,55.474 37.389,41.985 D3.2
NetD4_2: D4.2 K2.2 Q4.3 | length 13.9
  Top Layer w1.016: D4.2 50.773,41.985 53.238,44.45 53.238,46.711 52.705,47.244 Q4.3@49.662,47.244 ; K2.2 49.629,48.621 49.662,48.589 Q4.3@49.662,47.244 ; Q4.3 Q4.3@49.662,47.244
NetF1_2: F1.2 J3.2 | length 6.7
  Top Layer w1.016: J3.2 77.752,56.271 F1.2
NetIC2_22: IC2.22 R6.1 | length 24.1
  Top Layer w0.254: v1(66.548,65.075) 67.31,65.837 67.862,65.837 R6.1 ; IC2.22 78.125,70.414 79.451,69.088 v1(79.451,68.656)
  Bottom Layer w0.254: v1(66.548,65.075) 67.615,65.075 70.536,62.154 76.225,62.154 79.578,65.507 79.578,68.529 v1(79.451,68.656)
NetIC2_23: IC2.23 R5.1 | length 7.5
  Top Layer w0.254: R5.1 71.806,65.816 75.754,69.764 IC2.23
NetJ4_1: J4.1 K1.6 K1.7 | length 20
  Top Layer w1.016: J4.1 39.98,39.743 39.98,45.315 41.604,46.939 K1.6 K1.7
NetJ4_2: J4.2 K1.12 | length 23.5
  Top Layer w1.016: K1.12 35.531,51.263 35.531,40.593 37.247,38.877 J4.2
NetJ5_1: J5.1 K2.6 K2.7 | length 23.1
  Top Layer w1.016: v1(59.093,43.15) 59.093,49.525 K2.6 K2.7
  Bottom Layer w1.016: J5.1 57.023,43.15 v1(59.093,43.15)
NetJ5_2: J5.2 K2.12 | length 59.8
  Bottom Layer w1.016: K2.12 45.468,59.461 44.069,59.461 28.448,59.715 27.305,58.572 27.305,45.288 28.448,44.145 44.942,44.145 J5.2
NetLED1_1: R5.2 RX.1 | length 3.7
  Top Layer w0.254: R5.2 70.9,68.936 70.954,68.989 RX.1
NetLED2_1: R6.2 TX.1 | length 3.7
  Top Layer w0.254: R6.2 67.862,69.012 67.897,69.046 TX.1
NetLED3_2: LED3.2 R10.1 | length 2.5
  Top Layer w0.254: R10.1 68.859,60.414 68.919,60.474 LED3.2
NetLED4_2: LED4.2 R11.1 | length 9.2
  Top Layer w0.254: LED4.2 43.922,76.826 45.158,75.59 R11.1
NetLED5_2: LED5.2 R12.1 | length 9.8
  Top Layer w0.254: LED5.2 38.837,64.847 42.755,68.765 R12.1
NetQ1_1: Q1.1 R1.2 | length 2.2
  Top Layer w0.254: Q1.1 65.507,46.777 65.645,46.639 R1.2
NetQ2_1: Q2.1 R2.2 | length 2.2
  Top Layer w0.254: Q2.1 77.495,46.839 77.509,46.826 R2.2
NetQ3_1: Q3.1 R3.2 | length 2.3
  Top Layer w0.254: R3.2 29.286,44.64 29.429,44.783 Q3.1
NetQ4_1: Q4.1 R4.2 | length 2.9
  Top Layer w0.254: R4.2 47.244,44.64 47.293,44.689 Q4.1
NetR9_1: R9.1 S1.1 S1.2 | length 30.8
  Top Layer w0.254: S1.1 S1.2 31.7,74.295 33.071,72.924 v1(33.071,69.418) ; v1(45.034,62.662) 45.158,62.786 R9.1
  Bottom Layer w0.254: v1(33.071,69.418) 38.659,63.83 43.891,63.83 45.034,62.687 v1(45.034,62.662)
NetR13_1: R13.1 S2.1 S2.2 | length 40.7
  Top Layer w0.254: S2.2 S2.1 31.7,72.719 31.496,72.923 30.836,72.923 30.607,73.152 30.607,84.938 30.861,85.192 35.662,85.192 42.113,78.74 42.799,78.74 43.064,78.475 R13.1
PWR_GND: J3.1 J7.3 NT1.2 Q1.2 Q2.2 Q3.2 Q4.2 | length 104.1
  Top Layer w1.016: Q3.2 32.407,45.796 v1(32.915,46.304) ; Q4.2 50.612,45.252 v1(51.206,45.847) ; v1(62.078,43.993) 62.078,45.288 Q1.2 ; Q2.2 74.535,50.054 J3.1 79.686,56.058 79.649,56.095 NT1.2
  Bottom Layer w1.016: v1(32.915,46.304) v1@51.206,46.304 ; v1(51.206,45.847) v1@51.206,46.304 ; v1(62.078,43.993) 68.474,43.993 68.474,46.304 ; J7.3 78.062,70.085 80.268,70.085 80.859,69.494 80.859,56.378 J3.1 70.785,46.304 68.474,46.304 ; v1@51.206,46.304 68.474,46.304
RESET: C3.2 IC1.29 P2.5 | length 65.9
  Top Layer w0.254: P2.5 51.734,82.88 52.197,82.417 52.197,79.713 51.847,79.363 51.847,77.298 52.479,76.665 IC1.29@52.479,76.541 ; v1(86.131,87.605) 87.496,86.24 C3.2
  Bottom Layer w0.254: P2.5 55.384,88.223 76.849,88.223 77.238,87.833 85.03,87.833 85.264,88.067 85.475,88.067 85.937,87.605 v1(86.131,87.605)
RX: IC2.1 R8.2 | length 54.5
  Top Layer w0.254: v1(48.621,75.965) 47.503,75.965 47.242,76.225 47.242,80.58 47.242,80.684 47.333,80.774 49.11,82.269 cw(c49.273,82.075) 49.273,82.329 49.797,82.329 50.286,81.84 50.301,81.84 50.694,81.447 50.694,79.765 R8.2 ; v1(78.562,66.269) 78.808,66.514 IC2.1
  Bottom Layer w0.254: v1(48.621,75.965) 48.774,75.965 49.416,76.606 64.059,76.606 65.169,77.717 69.857,77.717 70.917,76.657 70.917,73.914 v1(78.562,66.269)
TX: IC2.5 R7.2 | length 50.1
  Top Layer w0.254: R7.2 49.084,79.767 49.483,80.166 49.483,80.832 v1(49.678,81.026) ; IC2.5 84.938,69.114 85.369,69.546 85.369,78.486 v1(84.963,78.892)
  Bottom Layer w0.254: v1(49.678,81.026) 66.085,81.026 66.391,81.333 82.523,81.333 v1(84.963,78.892)
USBDM: IC2.16 J6.2 | length 14.1
  Top Layer w0.254: IC2.16 81.325,74.314 81.788,74.778 81.788,82.086 81.756,82.118 J6.2
USBDP: IC2.15 J6.3 | length 12.8
  Top Layer w0.254: IC2.15 80.467,74.964 81.28,75.777 81.28,81.305 81.106,81.479 J6.3
pads on no net: IC2.3 IC2.6 IC2.8 IC2.9 IC2.10 IC2.11 IC2.12 IC2.13 IC2.14 IC2.19 IC2.24 IC2.27 IC2.28 J1.MH1 J1.MH2 J2.MH1 J2.MH2 J3.3 J4.MH1 J4.MH2 J5.MH1 J5.MH2 J6.1 J6.4 J6.6 J6.7 J6.8 J6.9 J6.10 J6.11 J7.4 J7.5 K1.1 K2.1 S1.4 S2.4 U1.2

## Polygon pours and split planes (outlines as drawn)
no net on Top Overlay "Top Overlay-No Net" (solid): 25.4,88.9 43.082,88.9 42.706,88.524 42.706,60.876 25.565,60.876 25.4,60.71
GND on Top Layer "GND_L01_P000" (solid, remove dead copper, pour order 0): 25.4,88.9 88.9,88.9 88.9,25.4 25.4,25.4
GND on Bottom Layer "GND_L02_P001" (solid, remove dead copper, pour order 1): 25.4,88.9 88.9,88.9 88.9,25.4 25.4,25.4

## Silkscreen, mask and mechanical layers (free items; w line width, h text height)
Top Overlay:
  drawing of 22 lines, arcs and shapes, not listed
  text "FAULT" at 34.877,79.101 h2.03
  text "TEST" at 34.877,69.308 h2.03
  text "FAULT" at 34.877,66.98 h2.03
  text "Safety PCBV1.1" at 85.563,34.24 h2.03 r90
Mechanical 1:
  the board outline again, w0.254

## Text inside footprints (layer, text, board x,y; h text height)
P2: Top Overlay "6" at 53.258,86.604 h1.27; Top Overlay "5" at 53.258,84.064 h1.27; Top Overlay "2" at 44.114,86.604 h1.27; Top Overlay "1" at 44.622,84.064 h1.27